# EAGLE board Grand Snaget (EAGLE 9.7.0)

Size 82.4 x 93.99 mm. Coordinates in mm from the lower left corner, seen from the top.
Outline: 0,0 82.4,0 82.4,93.99 0,93.99 0,0
Copper layers (1*16): Top 0.035mm / dielectric 1.5mm / Bottom 0.035mm
Design rules "default": minimum track width 6mil, minimum drill 0.35mm, track to track 6mil, track to pad 6mil, pad to pad 6mil, via to via 6mil, smd to smd 6mil, copper to edge 40mil, drill to drill 6mil, minimum pad ring 10mil, minimum via ring 8mil, stop-mask expansion 4mil, vias tented up to drill 0mil, thermal gap 10mil

## Footprints (pad centres in the part's own frame; a part is rotated, then mirrored left to right if it is on the bottom)
LEDRD254W60D565H860B_B = drill 0.981 pad 1.581: 1 -1.27,0; 2 1.27,0
LEDRD254W60D565H860B_G = drill 0.981 pad 1.581: 1 -1.27,0; 2 1.27,0
RESAD1016W63L850D250B = drill 0.83 pad 1.43: 1 -5.08,0; 2 5.08,0
SWITCH-MOMENTARY-PTH-6.5MM = drill 1.016 pad 1.88: 1 -3.251,2.261; 2 3.251,2.261; 3 -3.251,-2.261; 4 3.251,-2.261
ARDUINO-UNO-R3-SHIELD = drill 1.016 pad 1.88: 3.3V 24.13,-2.54; 5V 24.13,0; A0 24.13,12.7; A1 24.13,15.24; A2 24.13,17.78; A3 24.13,20.32; A4 24.13,22.86; A5 24.13,25.4; AREF -24.13,-13.97; D2 -24.13,20.32; D3 -24.13,17.78; D4 -24.13,15.24; D5 -24.13,12.7; D6 -24.13,10.16; D7 -24.13,7.62; D8 -24.13,3.81; D9 -24.13,1.27; D10 -24.13,-1.27; D11 -24.13,-3.81; D12 -24.13,-6.35; D13 -24.13,-8.89; GND@0 24.13,2.54; GND@1 24.13,5.08; GND@2 -24.13,-11.43; IOREF 24.13,-7.62; NC 24.13,-10.16; RES 24.13,-5.08; RX -24.13,25.4; SCL -24.13,-19.05; SDA -24.13,-16.51; TX -24.13,22.86; VIN 24.13,7.62

## Placement (x,y rotation side)
DLED_2  BLUE  [LEDRD254W60D565H860B_B]  60.56,77.73 180 top
DLED_3  GREEN  [LEDRD254W60D565H860B_G]  70.72,77.73 180 top
R1  1k  [RESAD1016W63L850D250B]  59.29,70.11 90 top
R2  1k  [RESAD1016W63L850D250B]  69.45,70.11 90 top
SBUTTON1  SWITCH_MOMENTARY  [SWITCH-MOMENTARY-PTH-6.5MM]  46.59,86.62 90 top
UARDUINO_UNO  ARDUINO-UNO-R3-SHIELD  [ARDUINO-UNO-R3-SHIELD]  47.88,29.84 270 top

## Library data of the parts
DLED_2 = Tinkercad; CATEGORY: Opto-Electronic; SUB-CATEGORY: LED; VALUE: LED_BLUE
DLED_3 = Tinkercad; CATEGORY: Opto-Electronic; SUB-CATEGORY: LED; VALUE: LED_GREEN
R1 R2 SBUTTON1 UARDUINO_UNO = Tinkercad

## Nets
DLED_2_C: DLED_2.2 R1.2
DLED_3_C: DLED_3.2 R2.2
UARDUINO_UNO_D2: DLED_3.1 UARDUINO_UNO.D2
UARDUINO_UNO_D4: DLED_2.1 UARDUINO_UNO.D4
UARDUINO_UNO_D7: SBUTTON1.1 SBUTTON1.2 UARDUINO_UNO.D7
UARDUINO_UNO_GND: R1.1 R2.1 SBUTTON1.3 SBUTTON1.4 UARDUINO_UNO.GND@0 UARDUINO_UNO.GND@1 UARDUINO_UNO.GND@2

## Tracks (layer width: path | path; a pad name or v marks a point on that pad's centre or on a via)
DLED_2_C  (1 unrouted)
DLED_3_C  (1 unrouted)
UARDUINO_UNO_D2  (1 unrouted)
UARDUINO_UNO_D4  (1 unrouted)
UARDUINO_UNO_D7  (2 unrouted)
UARDUINO_UNO_GND  (6 unrouted)